# Altium PCB PCB_2020-07-26_21-29-46_2020-09-12_09-12-22.pcbdoc
Units mm, origin at the board's own origin, x right, y up, seen from the top; angles counter-clockwise.
Board outline 85.95 x 97.55 mm, 2 copper layers (Top Layer, Bottom Layer); 55 components, 34 nets, 197 pads, 66 vias.
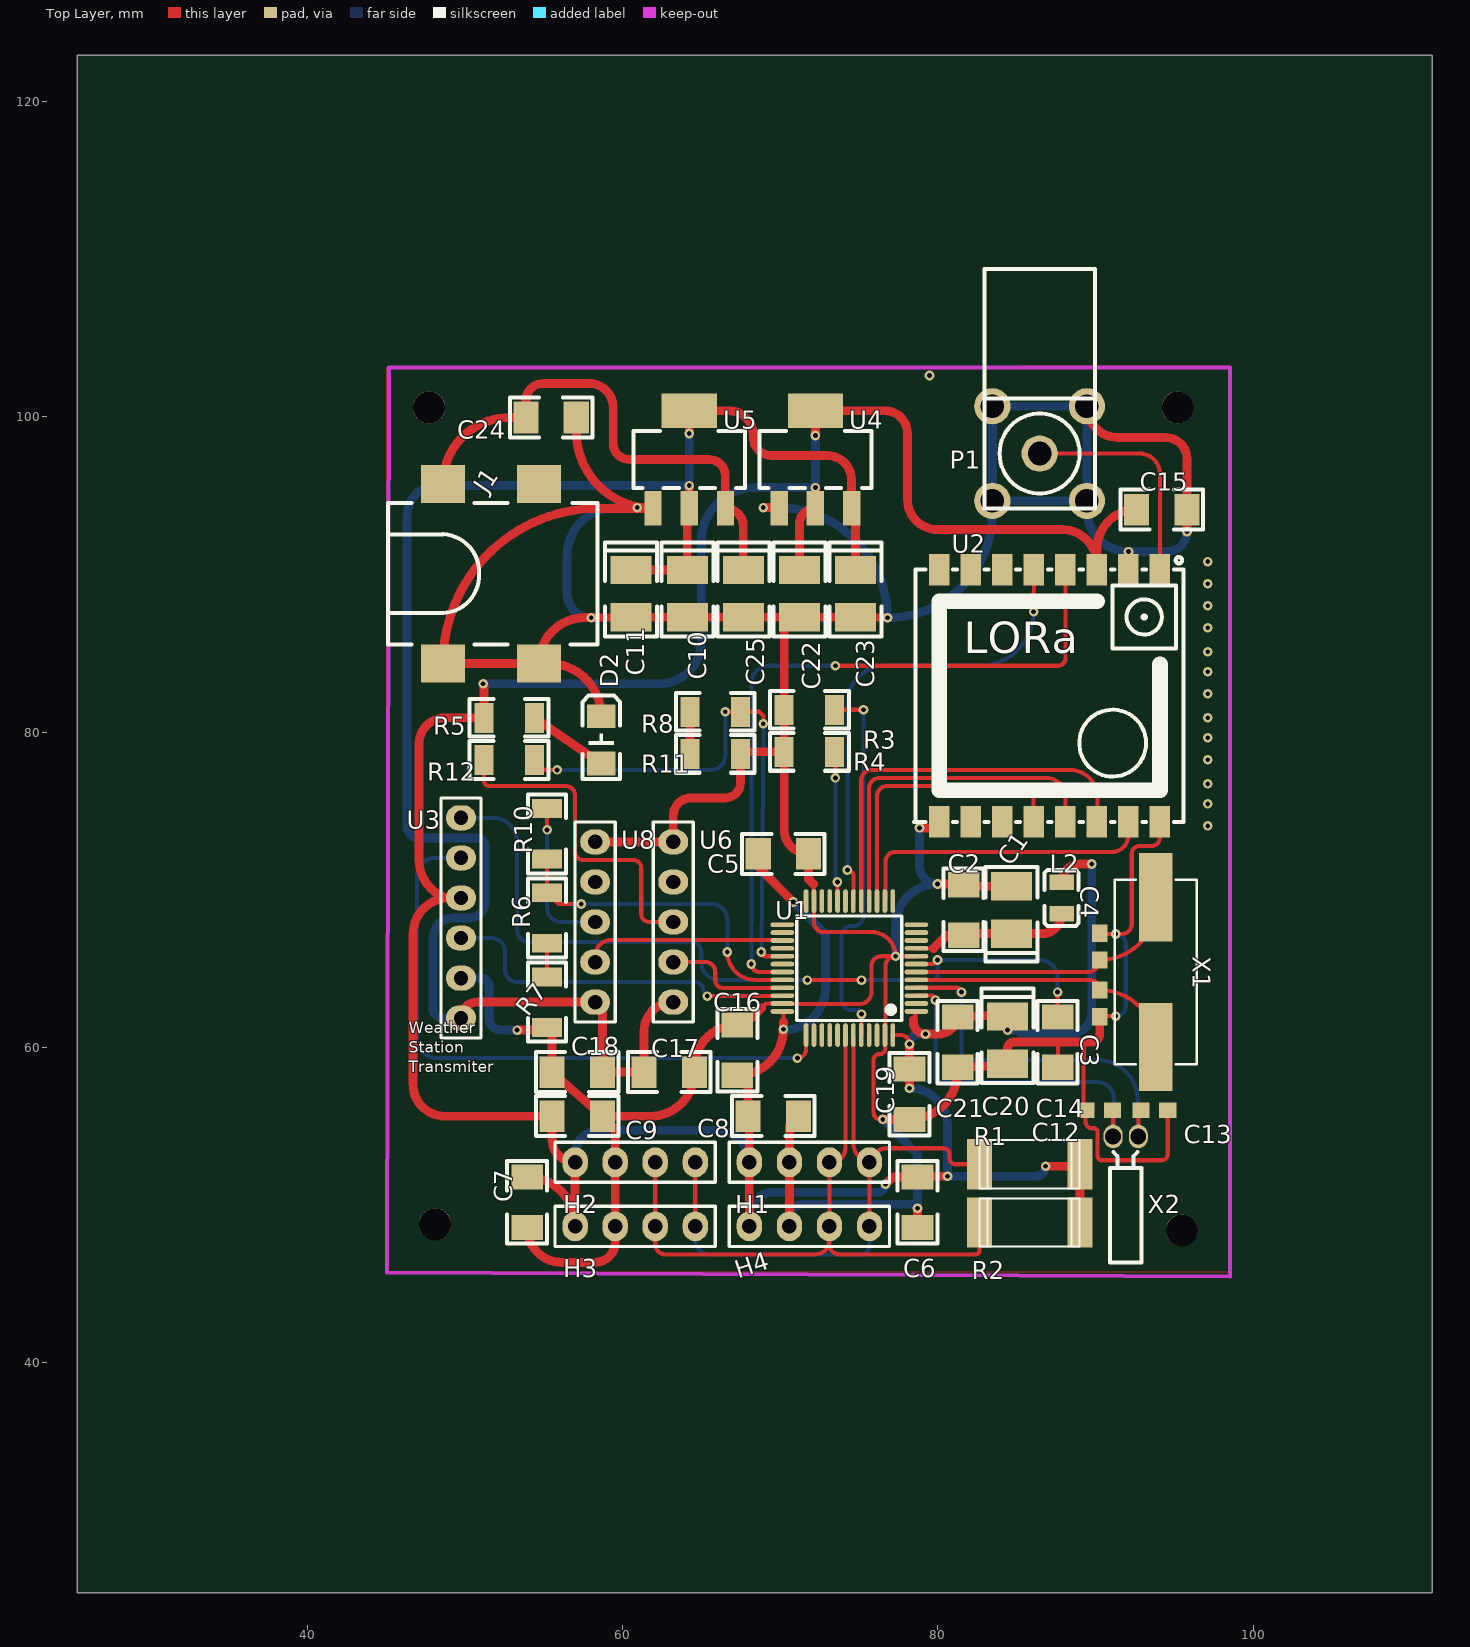
[diagram p0: Top Layer view]
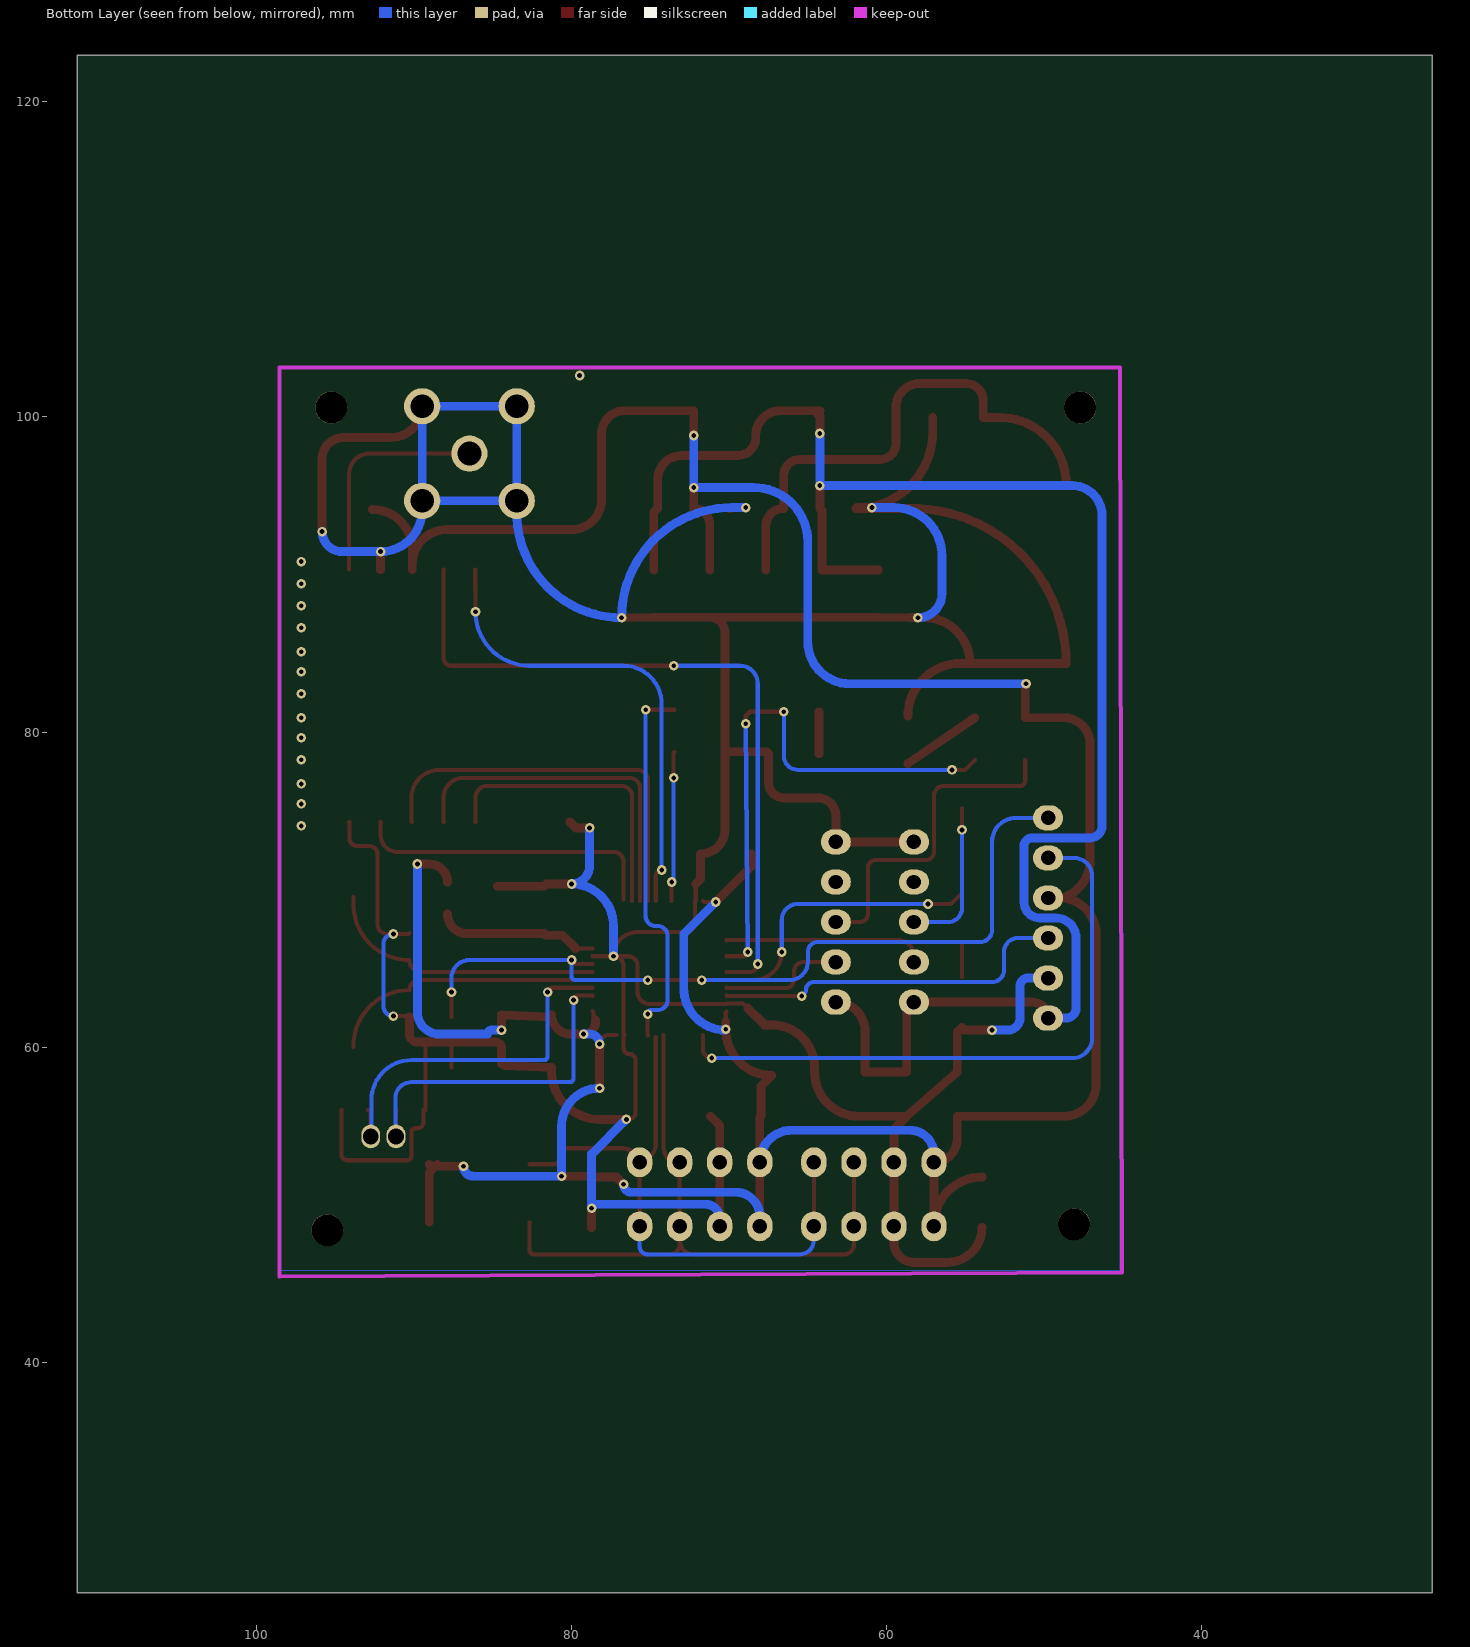
[diagram p1: Bottom Layer view, seen from below]

## Layer stack, top to bottom
Top Layer: signal copper (thickness not stored)
Dielectric: dielectric 0.32, FR-4, Dk 4.8
Bottom Layer: signal copper (thickness not stored)

## Board outline
111.351,25.4 25.4,25.4 25.4,122.953 111.351,122.953

## Components (designator, comment, footprint, x,y, rotation, side; value= is the part's Value field where it differs from the comment)
C1 "1uF" CAP-SMD_L3.5-W2.8-R-RD 84.681,68.722 r270 top
C2 "100nF" 1206 81.633,68.722 r90 top
C3 "10PF" 0603 90.269,63.642 r270 top
C4 "10PF" 0603 90.269,65.547 r90 top
C5 "100nF" 1206 70.203,72.278 r180 top
C6 "100nF" 1206 78.712,50.18 r90 top
C7 "100nF" 1206 53.947,50.18 r90 top
C8 "100nF" 1206 69.568,55.641 r180 top
C9 "100nF" 1206 57.122,55.641 r180 top
C10 "10uF" CAP-SMD_L3.5-W2.8-R-RD 64.107,88.788 r90 top
C11 "10uF" CAP-SMD_L3.5-W2.8-R-RD 60.551,88.788 r90 top
C12 "5PF" 0603 89.38,56.022 r0 top
C13 "5PF" 0603 94.587,56.022 r180 top
C14 "100nF" 1206 87.602,60.34 r90 top
C15 "100nF" 1206 94.206,94.122 r180 top
C16 "100nF" 1206 67.282,59.832 r90 top
C17 "100nF" 1206 62.964,58.435 r180 top
C18 "100nF" 1206 57.122,58.435 r0 top
C19 "100nF" 1206 78.204,57.038 r270 top
C20 "100nF" 1206 81.252,60.34 r270 top
C21 "10uF" CAP-SMD_L3.5-W2.8-R-RD 84.427,60.467 r90 top
C22 "10uF" CAP-SMD_L3.5-W2.8-R-RD 71.219,88.788 r90 top
C23 "10uF" CAP-SMD_L3.5-W2.8-R-RD 74.775,88.788 r90 top
C24 "100nF" 1206 55.471,99.964 r0 top
C25 "10uF" CAP-SMD_L3.5-W2.8-R-RD 67.663,88.788 r90 top
D2 "LED" LED1206-R-RD 58.646,79.517 r270 top
H1 "Header_4*1" HEADER_4*1 71.854,52.72 r90 top
H2 "Header_4*1" HEADER_4*1 60.805,52.72 r90 top
H3 "Header_4*1" HEADER_4*1 60.805,48.656 r90 top
H4 "Header_4*1" HEADER_4*1 71.854,48.656 r90 top
J1 "POWER_JACK" POWER_JACK_SMD_OVERPASTE_TOE 51.661,90.058 r0 top
L2 "4.7uH" L0805 87.856,69.484 r90 top
P1 "SMA-KWE" SMA-KWE 86.459,97.678 r90 top
R1 "4.7K" R_2512 85.824,52.593 r180 top
R2 "4.7K" R_2512 85.824,48.91 r180 top
R3 "10k" R1206 71.854,81.422 r0 top
R4 "10k" R1206 71.854,78.755 r0 top
R5 "100" R1206 52.804,80.914 r0 top
R6 "10K" R1206 55.217,68.214 r270 top
R7 "10K" R1206 55.217,62.88 r270 top
R8 "10K" R1206 65.885,81.295 r0 top
R10 "10K" R1206 55.217,73.548 r90 top
R11 "10K" R1206 65.885,78.628 r0 top
R12 "10K" R1206 52.804,78.247 r180 top
U1 "STM32F103CBT6" LQFP-48_L7.0-W7.0-P0.50-LS9.0-BL 74.394,65.039 r90 top
U2 "RA-02" WIRELM-SMD_RA-02 87.094,82.311 r270 top
U3 "HEADER6*1" HEADER_6*1#1 49.756,68.214 r0 top
U4 "AMS1117-3.3V" SOT-223-3_L6.5-W3.4-P2.30-LS7.0-BR 72.235,97.297 r270 top
U5 "AMS1117-5V" SOT-223-3_L6.5-W3.4-P2.30-LS7.0-BR 64.234,97.297 r270 top
U6 "HEADER 5*1" HEADER_6*1#2 61.948,64.15 r0 top
U8 "HEADER 5*1" HEADER_6*1#2 56.995,64.15 r0 top
X1 "8MHz" HC-49US-SMD 93.825,64.531 r90 top
X2 "Seiko" OSC-TH_BD2.0-P0.50 91.92,53.355 r180 top
? "" ? 41.668,74.437 r0 top
? "" ? 71.727,41.943 r0 top

## Footprints (in the part's own frame and the unit in brackets; to place one, negate y for a bottom-side part, rotate by r counter-clockwise, add the part's x,y. Pads: shape width x height; smd on the part's side, far side on the other; paste and mask are expansions set on the pad)
0603 [mm]
  rect 1.1x1 smd: 1(0,0) 2(1.7,0)
1206 [mm]
  rect 1.6x2 smd: 1(-1.6,0) 2(1.6,0)
  silkscreen extent -2.61,-1.27 2.62,1.27
CAP-SMD_L3.5-W2.8-R-RD [mm]
  rect 1.8x2.6 smd: 1(1.501,0) 2(-1.501,0)
  silkscreen extent -2.73,-1.65 3.26,1.65
HC-49US-SMD [mm]
  rect 5.6x2.1 smd: 1(-4.5,0) 2(5,0)
  silkscreen extent -5.6,-2.6 6.1,2.6
HEADER_4*1 [mm]
  oval 1.9x1.6 hole 0.914: 1(0,3.81) 2(0,1.27) 3(0,-1.27) 4(0,-3.81)
  silkscreen extent -1.27,-5.08 1.27,5.08
HEADER_6*1#1 [mm]
  oval 1.9x1.6 hole 0.914: 1(0,6.35) 2(0,3.81) 3(0,1.27) 4(0,-1.27) 5(0,-3.81) 6(0,-6.35)
  silkscreen extent -1.27,-7.62 1.27,7.62
HEADER_6*1#2 [mm]
  oval 1.9x1.6 hole 0.914: 1(1.27,8.89) 2(1.27,6.35) 3(1.27,3.81) 4(1.27,1.27) 5(1.27,-1.27)
  silkscreen extent 0,-2.54 2.54,10.16
L0805 [mm]
  rect 1x1.55 smd: 1(-1,0) 2(1,0)
  silkscreen extent -1.78,-1.08 1.78,1.08
LED1206-R-RD [mm]
  rect 1.5x1.8 smd: 1(1.5,0) 2(-1.5,0)
  silkscreen extent -2.8,-1.2 2.5,1.2
LQFP-48_L7.0-W7.0-P0.50-LS9.0-BL [mm]
  oval 0.3x1.5 smd: 1(-2.75,-4.25) 2(-2.25,-4.25) 3(-1.75,-4.25) 4(-1.25,-4.25) 5(-0.75,-4.25) 6(-0.25,-4.25) 7(0.25,-4.25) 8(0.75,-4.25) 9(1.25,-4.25) 10(1.75,-4.25) 11(2.25,-4.25) 12(2.75,-4.25) 25(2.75,4.25) 26(2.25,4.25) 27(1.75,4.25) 28(1.25,4.25) 29(0.75,4.25) 30(0.25,4.25) 31(-0.25,4.25) 32(-0.75,4.25) 33(-1.25,4.25) 34(-1.75,4.25) 35(-2.25,4.25) 36(-2.75,4.25)
  oval 1.5x0.3 smd: 13(4.25,-2.75) 14(4.25,-2.25) 15(4.25,-1.75) 16(4.25,-1.25) 17(4.25,-0.75) 18(4.25,-0.25) 19(4.25,0.25) 20(4.25,0.75) 21(4.25,1.25) 22(4.25,1.75) 23(4.25,2.25) 24(4.25,2.75) 37(-4.25,2.75) 38(-4.25,2.25) 39(-4.25,1.75) 40(-4.25,1.25) 41(-4.25,0.75) 42(-4.25,0.25) 43(-4.25,-0.25) 44(-4.25,-0.75) 45(-4.25,-1.25) 46(-4.25,-1.75) 47(-4.25,-2.25) 48(-4.25,-2.75)
  silkscreen extent -3.33,-3.31 3.3,3.34
OSC-TH_BD2.0-P0.50 [mm]
  oval 1.2x1.5 hole 1: 1(-0.8,-1) 2(0.8,-1)
  silkscreen extent -1,-0.02 1,7
POWER_JACK_SMD_OVERPASTE_TOE [mil]
  rect 110.2x94.5 smd: GND(-120,-224) P$4(120,-224) VIN0(-120,224) VIN1(120,224)
  silkscreen extent -258,-177 266,177
R1206 [mm]
  rect 1.2x1.9 smd: 1(-1.6,0) 2(1.6,0)
  silkscreen extent -2.5,-1.2 2.5,1.2
R_2512 [mil]
  rect 63x125 smd: 1(125.5,0) 2(-125.5,0)
  silkscreen extent -125,-60 125,60
SMA-KWE [mm]
  round 2.3 hole 1.5: 1(0,0) 2(-3,3) 3(-3,-3) 4(3,-3) 5(3,3)
  silkscreen extent -3.5,-3.5 11.7,3.5
SOT-223-3_L6.5-W3.4-P2.30-LS7.0-BR [mm]
  rect 2.2x1.1 smd: 1(3.099,-2.3) 2(3.099,0) 3(3.099,2.3)
  rect 2.2x3.5 smd: 4(-3.099,0)
  silkscreen extent -1.8,-3.55 1.8,3.55
WIRELM-SMD_RA-02 [mm]
  rect 2x1.3 smd: 1(-8,7) 2(-8,5) 3(-8,3) 4(-8,1) 5(-8,-1) 6(-8,-3) 7(-8,-5) 8(-8,-7) 9(8,-7) 10(8,-5) 11(8,-3) 12(8,-1) 13(8,1) 14(8,3) 15(8,4.998) 16(8,7)
  silkscreen extent -8.8,-8.6 8,8.5
? [mm]

## Free pads (board coordinates)
  round 2.032 hole 2.032 unplated: ""(47.724,100.599) ""(48.105,48.783) ""(95.222,100.599) ""(95.476,48.402)

## Via types
v1: diameter 0.61, hole 0.305, Top Layer to Bottom Layer, 66 vias

## Nets (pads, with @x,y where several pads share a name; then routed paths per layer and width w, separated by ;. In a path a pad name is that pad's centre, name@x,y a point inside that pad or via, vN(x,y) a via of type N, cw(c..) or ccw(c..) an arc to the next point about the centre after c; other vN are vias at no path point)
+3.3V: C5.2 C6.2 C7.2 C8.2 C9.2 C15.2 C16.1 C19.1 C20.1 C21.1 C22.1 H1.1 H2.1 H3.1 H4.1 L2.2 R1.2 R2.2 R5.1 U1.1 U1.24 U1.36 U1.48 U2.3 U3.3 U4.2 U4.4 | length 238.4
  Top Layer w0.26: U1.36 70.203,62.23 70.203,61.61 ; v1(70.838,69.23) 71.586,69.23 U1.24 ; U1.48 77.628,60.789 cw(c77.628,60.213) v1(78.204,60.213) ; 78.585,61.864 78.585,62.23 U1.1@78.644,62.295
  Top Layer w0.56: U3.3@49.629,69.357 cw(c49.629,71.897) 47.089,71.897 47.089,79.263 cw(c48.74,79.263) 48.74,80.914 R5.1 51.205,83.022 v1(51.153,83.073) ; U3.3 48.994,69.484 ccw(c48.994,67.198) 46.708,67.198 46.708,57.673 ccw(c48.74,57.673) 48.74,55.641 C9.2 55.523,54.193 ccw(c56.995,54.193) H2.1 H3.1 56.995,48.732 ccw(c53.947,48.732) C7.2 ; H4.1 H1.1 68.044,55.565 C8.2 67.969,57.546 C16.1 ccw(c67.282,61.153) v1(70.203,61.153) 70.203,61.61 ; C5.2 68.604,71.465 v1(70.838,69.23) ; C22.1 71.219,93.182 cw(c72.235,93.182) U4.2 v1(72.235,95.519) ; v1(72.235,98.821) U4.4 76.63,100.395 cw(c76.63,98.948) 78.077,98.948 78.077,94.757 ccw(c79.982,94.757) 79.982,92.852 87.891,92.852 cw(c87.891,90.648) U2.3@90.094,90.648 ; v1(76.68,51.323) 77.137,51.78 C6.2 78.764,51.831 v1(80.617,51.831) ; v1(78.204,57.419) C19.1 v1(78.204,60.213) ; 78.458,61.737 78.458,61.61 ccw(c79.22,61.61) v1(79.22,60.848) 80.034,60.848 ccw(c80.034,62.067) C20.1@81.252,62.067 ; C20.1 C21.1@84.4,62.067 ; v1(84.427,61.102) C21.1 C21.1@84.4,62.067 ; C21.1@84.427,62.038 ccw(c84.399,62.038) C21.1@84.399,62.067 ; v1(86.84,52.466) 88.885,52.466 R1.2 ; L2.2 cw(c89.015,70.484) 89.015,71.643 v1(89.761,71.643) ; R1.2@88.504,52.593 89.012,52.085 R2.2 ; U2.3 90.094,91.61 cw(c92.607,91.61) C15.2
  Bottom Layer w0.56: v1(51.153,83.073) 62.329,83.073 ccw(c62.329,85.74) 64.996,85.74 64.996,92.09 cw(c68.425,92.09) 68.425,95.519 v1(72.235,95.519) v1(72.235,98.821) ; H2.1 56.995,53.228 cw(c58.519,53.228) 58.519,54.752 66.012,54.752 cw(c66.012,52.72) H1.1 ; H4.1 68.044,49.291 cw(c69.568,49.291) 69.568,50.815 76.172,50.815 ccw(c76.172,51.323) v1(76.68,51.323) ; v1@70.203,61.102 ccw(c70.203,63.769) 72.87,63.769 ; v1(70.838,69.23) 72.87,67.198 72.87,66.563 ; 72.87,63.769 72.87,66.512 ; v1(78.204,57.419) cw(c78.204,55.006) 80.617,55.006 v1(80.617,51.831) 86.205,51.831 ccw(c86.205,52.466) v1(86.84,52.466) ; v1(78.204,60.213) cw(c78.839,60.213) 78.839,60.848 v1(79.22,60.848) ; v1(84.427,61.102) 85.062,61.102 cw(c85.062,60.848) 85.316,60.848 88.364,60.848 ccw(c88.364,62.245) 89.761,62.245 v1(89.761,71.643)
+5V: C10.1 C11.1 C17.2 C18.2 C23.1 U3.6 U4.3 U5.2 U5.4 U6.5 U8.5 | length 113.3
  Top Layer w0.56: U3.6 cw(c50.772,61.864) 50.772,62.88 U8.5 58.722,62.423 C18.2 C17.2 61.365,61.026 cw(c63.218,61.026) U6.5 ; C11.1 C10.1 64.107,94.071 U5.2 v1(64.234,95.646) ; v1(64.234,98.948) 64.234,100.04 U5.4@64.412,100.218 ; U5.4 66.724,100.395 cw(c66.724,98.821) 68.298,98.821 68.298,98.694 ccw(c69.441,98.694) 69.441,97.551 72.997,97.551 cw(c72.997,96.027) 74.521,96.027 74.521,94.212 ccw(c74.535,94.212) U4.3 74.775,93.958 C23.1
  Bottom Layer w0.56: U3.6 48.613,61.864 cw(c48.613,62.499) 47.978,62.499 47.978,66.944 cw(c49.248,66.944) 49.248,68.214 50.264,68.214 ccw(c50.264,69.23) 51.28,69.23 51.28,72.786 ccw(c50.772,72.786) 50.772,73.294 47.089,73.294 cw(c47.089,74.056) 46.327,74.056 46.327,74.564 46.327,93.741 cw(c48.232,93.741) 48.232,95.646 v1(64.234,95.646) v1(64.234,98.948)
GND: C1.2 C2.2 C3.2 C4.2 C5.1 C6.1 C7.1 C8.1 C9.1 C10.2 C11.2 C12.1 C13.1 C14.1 C15.1 C16.2 C17.1 C18.1 C19.2 C20.2 C21.2 C22.2 C23.2 C24.2 C25.2 D2.2 H1.2 H2.2 H3.2 H4.2 J1.GND J1.P$4 P1.2 P1.3 P1.4 P1.5 R3.1 R4.1 R7.2 R11.2 U1.8 U1.23 U1.35 U1.47 U2.2 U2.9 U2.16 U3.5 U4.1 U5.1 U6.1 U8.1 | length 354.2
  Top Layer w0.26: 68.806,62.499 69.097,62.789 U1.35 ccw(c70.181,62.789) 70.181,62.753 75.029,62.753 ccw(c75.029,63.515) 75.791,63.515 75.791,65.166 cw(c76.415,65.166) 76.415,65.789 v1(77.323,65.789) ; 72.108,70.373 72.108,69.325 U1.23 72.145,67.924 ccw(c72.743,67.924) 72.743,67.325 73.378,67.325 75.787,67.325 cw(c75.787,65.789) v1(77.323,65.789) ; v1(76.508,55.438) 76.375,55.438 cw(c76.375,55.895) 75.918,55.895 75.918,59.197 cw(c76.299,59.197) 76.299,59.578 ccw(c76.299,59.959) 76.68,59.959 76.68,60.753 ccw(c76.644,60.753) U1.47 ccw(c76.644,60.825) 76.68,60.825 76.68,65.166 cw(c77.304,65.166) v1@77.304,65.789 ; U1.8 v1(77.323,65.789) ; C14.1 87.613,60.34 ; C14.1@87.602,58.867 ccw(c87.602,58.877) C14.1@87.613,58.877 ; C12.1@89.253,56.022 89.253,59.477 ccw(c89.253,59.484) 89.261,59.484 89.261,60.34 ; C12.1@89.344,56.058 ccw(c89.38,56.058) C12.1 89.38,55.26 ccw(c89.761,55.26) 89.761,54.879 89.888,54.879 cw(c89.888,54.625) 90.142,54.625 90.142,53.101 ccw(c90.396,53.101) 90.396,52.847 94.206,52.847 ccw(c94.206,53.228) 94.587,53.228 C13.1 ; C3.2 90.319,61.991 v1(91.285,61.991) ; C4.2 90.318,67.198 v1(91.285,67.198) 91.666,67.198 ccw(c91.666,67.833) 92.301,67.833 92.301,72.278 cw(c92.809,72.278) 92.809,72.786 93.571,72.786 ccw(c93.571,73.294) 94.079,73.294 94.079,74.296 cw(c94.094,74.296) U2.16
  Top Layer w0.56: v1(53.312,61.102) 55.04,61.102 R7.2 55.523,60.974 C18.1 C9.1 ; C7.1 ccw(c56.158,48.58) 56.158,46.37 58.265,46.37 ccw(c58.265,47.64) 59.535,47.64 H3.2 H2.2 59.535,54.828 C9.1 ; C24.2 57.071,99.061 ccw(c61.935,99.061) U5.1 ; v1(58.011,87.264) C11.2 C10.2 C25.2 C22.2 ; U8.1 U6.1 63.218,74.691 cw(c64.361,74.691) 64.361,75.834 66.52,75.834 ccw(c66.52,76.799) 67.485,76.799 R11.2 67.612,78.755 R4.1 ; 58.503,87.268 57.61,87.268 ccw(c57.61,84.368) J1.P$4 ; D2.2 ccw(c55.295,81.016) 55.295,84.368 J1.P$4 ; v1(60.932,94.249) 61.884,94.249 U5.1 ; 68.806,62.499 67.739,61.432 C16.2 ccw(c67.282,58.713) 64.564,58.713 C17.1 cw(c61.77,58.435) 61.77,55.641 C9.1 ; v1(68.933,94.249) 69.885,94.249 U4.1 ; H4.2 H1.2 70.584,55.057 C8.1 ; 72.108,70.373 71.803,70.678 C5.1 cw(c71.803,73.826) 70.255,73.826 R4.1 ; v1(76.508,55.438) C19.2 ccw(c78.204,58.486) C20.2@81.252,58.486 ; v1(76.807,87.264) C23.2 C22.2 ; C6.1 v1(78.712,49.799) ; v1(78.839,73.929) 79.712,73.929 U2.9 ; v1(79.982,70.373) 81.582,70.373 C2.2 81.732,70.223 C1.2 ; C20.2@81.252,58.485 C20.2 84.201,58.866 C21.2 84.427,59.959 cw(c84.808,59.959) 84.808,60.34 89.761,60.34 ccw(c89.761,60.848) 90.269,60.848 C3.2 C3.2@90.269,61.534 ; P1.4 ccw(c91.443,100.677) 91.443,98.694 92.047,98.694 94.46,98.694 cw(c94.46,97.348) 95.806,97.348 C15.1 v1(95.806,92.725) ; U2.2 v1(92.094,91.455) ; J1.P$4 J1.GND cw(c58.443,84.368) 58.443,94.198 U5.1 ; R4.1 R3.1 70.255,86.321 cw(c71.219,86.321) C22.2
  Bottom Layer w0.26: v1(91.285,61.991) ccw(c91.285,62.626) 91.92,62.626 91.92,66.563 ccw(c91.285,66.563) v1(91.285,67.198)
  Bottom Layer w0.56: U3.5 51.026,64.404 cw(c51.026,63.896) 51.534,63.896 51.534,61.864 ccw(c52.296,61.864) 52.296,61.102 v1(53.312,61.102) ; v1(58.011,87.264) cw(c58.011,88.788) 56.487,88.788 56.487,91.201 cw(c59.535,91.201) 59.535,94.249 v1(60.932,94.249) ; v1(68.933,94.249) 69.822,94.249 cw(c69.822,87.264) v1(76.807,87.264) ccw(c76.807,93.916) 83.46,93.916 P1.2 ; H4.2 70.584,49.164 cw(c71.473,49.164) 71.473,50.053 71.981,50.053 78.458,50.053 cw(c78.458,49.799) v1(78.712,49.799) 78.712,53.233 v1(76.508,55.438) ; v1(77.323,65.789) 77.323,67.713 cw(c79.982,67.713) v1(79.982,70.373) cw(c79.982,71.516) 78.839,71.516 v1(78.839,73.929) ; v1(95.806,92.725) cw(c94.536,92.725) 94.536,91.455 v1(92.094,91.455) cw(c92.094,94.09) 89.459,94.09 P1.3 ; P1.2 P1.5 P1.4 P1.3 ; P1.2 P1.3
I2C_SCL: H1.3 H2.3 H3.3 H4.3 R2.1 U1.42 | length 42.9
  Top Layer w0.26: H2.3 H3.3 62.075,47.513 ccw(c62.71,47.513) 62.71,46.878 72.235,46.878 ccw(c72.235,47.767) H4.3@73.124,47.767 ; H1.3@73.124,52.647 ccw(c73.124,53.667) 74.145,53.667 U1.42 ; H1.3 H4.3 73.124,47.513 ccw(c73.759,47.513) 73.759,46.878 82.395,46.878 ccw(c82.395,47.132) 82.649,47.132 82.649,48.897 ccw(c82.637,48.897) R2.1
I2C_SDA: H1.4 H2.4 H3.4 H4.4 R1.1 U1.43 | length 38.9
  Top Layer w0.26: H3.4 H2.4 ; 74.644,53.792 U1.43@74.644,60.662 ; 74.644,53.919 ccw(c75.844,53.919) 75.844,52.72 cw(c76.733,52.72) 76.733,53.609 80.363,53.609 cw(c80.363,53.228) 80.744,53.228 80.744,52.974 ccw(c81.125,52.974) 81.125,52.593 R1.1 ; H4.4 H1.4
  Bottom Layer w0.26: H3.4 64.615,47.767 ccw(c65.504,47.767) 65.504,46.878 75.156,46.878 ccw(c75.156,47.386) 75.664,47.386 H4.4
LORA_DIO0: U1.18 U2.5 | length 30.5
  Top Layer w0.26: v1(74.267,71.262) cw(c74.267,70.885) 74.644,70.885 U1.18 ; v1(86.078,87.645) U2.5@86.094,90.312
  Bottom Layer w0.26: v1(74.267,71.262) 74.267,81.803 cw(c76.68,81.803) 76.68,84.216 82.649,84.216 ccw(c82.649,87.645) v1(86.078,87.645)
LORA_MISO: U1.16 U2.13 | length 22.3
  Top Layer w0.26: U1.16 75.644,76.449 cw(c76.299,76.449) 76.299,77.104 86.84,77.104 cw(c86.84,75.834) 88.11,75.834 88.11,74.327 cw(c88.094,74.327) U2.13
LORA_MOSI: U1.17 U2.14 | length 25.6
  Top Layer w0.26: U1.17 75.145,76.965 cw(c75.791,76.965) 75.791,77.612 88.364,77.612 cw(c88.364,75.834) 90.142,75.834 90.142,74.359 cw(c90.094,74.359) U2.14
LORA_NSS: U1.14 U2.15 | length 19.6
  Top Layer w0.26: U1.14@76.68,69.377 76.68,71.77 cw(c77.315,71.77) 77.315,72.405 91.031,72.405 ccw(c91.031,73.466) 92.093,73.466 U2.15
LORA_RST: U1.31 U2.4 | length 46.5
  Top Layer w0.26: v1(68.171,65.293) ccw(c68.675,65.293) 68.675,64.789 U1.31 ; v1(73.505,84.216) 87.602,84.216 ccw(c87.602,84.724) 88.11,84.724 88.11,90.295 ccw(c88.094,90.295) U2.4
  Bottom Layer w0.26: v1(68.171,65.293) 68.171,83.073 cw(c69.314,83.073) 69.314,84.216 v1(73.505,84.216)
LORA_SCK: U1.15 U2.12 | length 18.9
  Top Layer w0.26: U1.15 76.145,75.933 cw(c76.807,75.933) 76.807,76.596 85.316,76.596 cw(c85.316,75.834) 86.078,75.834 86.078,74.327 ccw(c86.094,74.327) U2.12
NRST: C14.2 U1.7 U3.1 | length 52.1
  Top Layer w0.26: v1(71.727,64.277) v1(75.156,64.277) ; U1.7 79.724,65.289 v1(79.982,65.547) ; C14.2 v1(87.602,63.515)
  Bottom Layer w0.26: U3.1 51.788,74.564 cw(c51.788,73.04) 53.312,73.04 53.312,67.452 ccw(c54.074,67.452) 54.074,66.69 64.361,66.69 cw(c64.361,66.055) 64.996,66.055 64.996,65.42 ccw(c66.139,65.42) 66.139,64.277 v1(71.727,64.277) ; v1(75.156,64.277) 79.728,64.277 ccw(c79.728,64.531) 79.982,64.531 v1(79.982,65.547) 86.459,65.547 cw(c86.459,64.404) 87.602,64.404 v1(87.602,63.515)
R5_2: D2.1 R5.2 | length 5.1
  Top Layer w0.56: R5.2 D2.1
R6_2: R6.2 R7.1 | length 2.1
  Top Layer w0.26: R7.1 R6.2
R8_1: R8.1 R11.1 | length 2.7
  Top Layer w0.56: R11.1 R8.1
R10_2: R10.2 U8.3 | length 9.9
  Top Layer w0.26: v1(55.217,73.802) R10.2
  Bottom Layer w0.26: v1(55.217,73.802) 55.217,68.849 ccw(c56.106,68.849) 56.106,67.96 U8.3
R12_2: R12.2 U6.3 | length 21.2
  Top Layer w0.26: R12.2 51.205,76.926 ccw(c51.534,76.926) 51.534,76.596 56.36,76.596 cw(c56.36,75.961) 56.995,75.961 56.995,72.405 ccw(c57.503,72.405) 57.503,71.897 60.678,71.897 cw(c60.678,71.389) 61.186,71.389 61.186,68.468 ccw(c61.694,68.468) 61.694,67.96 U6.3
S$98: 
S$107: 
SWCLK: U1.37 U3.2 | length 40.4
  Top Layer w0.26: v1(71.092,59.324) ccw(c71.092,59.876) 71.644,59.876 U1.37
  Bottom Layer w0.26: U3.2 48.105,72.024 ccw(c48.105,70.881) 46.962,70.881 46.962,60.594 ccw(c48.232,60.594) 48.232,59.324 v1(71.092,59.324)
SWDIO: U1.34 U3.4 | length 23.2
  Top Layer w0.26: v1(65.377,63.261) 70.117,63.261 U1.34
  Bottom Layer w0.26: U3.4 51.661,66.944 cw(c51.661,66.055) 52.55,66.055 52.55,65.166 52.55,64.912 ccw(c53.312,64.912) 53.312,64.15 64.615,64.15 cw(c64.615,63.642) 65.123,63.642 ccw(c65.504,63.642) 65.504,63.261 v1(65.377,63.261)
U1_3: C12.2 U1.3 X2.2 | length 22.5
  Top Layer w0.26: U1.3@78.672,63.261 cw(c78.672,63.289) U1.3 79.574,63.289 cw(c79.574,63.007) v1(79.855,63.007) ; C12.2 cw(c91.081,55.982) 91.121,55.982 X2.2
  Bottom Layer w0.26: v1(79.855,63.007) 79.855,58.054 ccw(c80.109,58.054) 80.109,57.8 90.142,57.8 cw(c90.142,56.784) 91.158,56.784 91.158,54.393 cw(c91.121,54.393) X2.2
U1_4: C13.2 U1.4 X2.1 | length 24
  Top Layer w0.26: U1.4@78.664,63.769 cw(c78.664,63.789) U1.4 81.232,63.789 cw(c81.232,63.515) v1(81.506,63.515) ; X2.1 92.72,55.855 cw(c92.887,55.855) C13.2
  Bottom Layer w0.26: v1(81.506,63.515) 81.506,59.451 ccw(c81.76,59.451) 81.76,59.197 90.142,59.197 cw(c90.142,56.657) 92.682,56.657 92.682,54.393 ccw(c92.72,54.393) X2.1
U1_5: C3.1 U1.5 X1.1 | length 17.6
  Top Layer w0.26: U1.5 89.623,64.289 cw(c89.623,63.642) C3.1 cw(c90.269,60.086) 93.825,60.086 X1.1
U1_6: C4.1 U1.6 X1.2 | length 18.1
  Top Layer w0.26: U1.6 89.512,64.789 ccw(c89.512,65.547) C4.1 ccw(c90.269,69.103) 93.825,69.103 X1.2
U1_9: C1.1 C2.1 L2.1 U1.9 | length 10.3
  Top Layer w0.26: U1.9 79.728,66.289
  Top Layer w0.56: 79.728,66.289 80.562,67.122 C2.1 81.732,67.22 C1.1 86.593,67.22 ccw(c86.593,68.484) L2.1
U1_20: R4.2 U1.20 | length 9.5
  Top Layer w0.26: R4.2 73.505,78.704 v1(73.505,77.104) ; v1(73.632,70.5) U1.20
  Bottom Layer w0.26: v1(73.505,77.104) 73.505,70.627 v1(73.632,70.5)
U1_44: R3.2 U1.44 | length 24.2
  Top Layer w0.26: R3.2 v1(75.283,81.422) ; U1.44@75.145,60.777 ccw(c75.145,60.789) 75.156,60.789 v1(75.156,62.118) ; U1.44 cw(c75.145,60.777) U1.44@75.156,60.777
  Bottom Layer w0.26: v1(75.156,62.118) ccw(c74.902,62.118) 74.902,62.372 74.521,62.372 cw(c74.521,63.007) 73.886,63.007 73.886,67.071 cw(c74.521,67.071) 74.521,67.706 74.648,67.706 ccw(c74.648,68.341) 75.283,68.341 v1(75.283,81.422)
U2_1: P1.1 U2.1 | length 14.5
  Top Layer w0.26: P1.1 92.809,97.678 cw(c92.809,96.393) 94.094,96.393 U2.1
ULTRASONIC1_ECHO: R8.2 R12.1 U1.29 | length 34.7
  Top Layer w0.26: R12.1 55.039,77.612 v1(55.852,77.612) ; v1(66.52,81.295) R8.2 68.679,81.295 68.933,81.041 v1(68.933,80.533) ; v1(68.806,66.055) ccw(c69.072,66.055) 69.072,65.789 U1.29
  Bottom Layer w0.26: v1(55.852,77.612) 65.631,77.612 ccw(c65.631,78.501) 66.52,78.501 v1(66.52,81.295) ; v1(68.806,66.055) v1(68.933,80.533)
ULTRASONIC1_TRIG: U1.33 U6.4 | length 8.1
  Top Layer w0.26: U6.4 65.25,65.42 cw(c65.25,64.785) 65.885,64.785 65.885,64.277 ccw(c66.393,64.277) 66.393,63.769 70.124,63.769 ccw(c70.124,63.789) U1.33
ULTRASONIC2_ECHO: R6.1 R10.1 U1.32 | length 21
  Top Layer w0.26: R10.1 R6.1 55.928,69.103 v1(57.376,69.103) ; v1(66.647,66.055) ccw(c68.414,66.055) 68.414,64.289 U1.32 cw(c70.133,64.289) U1.32@70.133,64.277
  Bottom Layer w0.26: v1(57.376,69.103) 65.631,69.103 cw(c65.631,68.087) 66.647,68.087 v1(66.647,66.055)
ULTRASONIC2_TRIG: U1.27 U8.4 | length 12.9
  Top Layer w0.26: U8.4 58.265,65.801 cw(c59.281,65.801) 59.281,66.817 70.117,66.817 cw(c70.117,66.789) U1.27
VCC: C24.1 C25.1 J1.VIN0 U5.3 | length 33
  Top Layer w0.56: J1.VIN0 cw(c52.83,95.747) 52.83,99.964 C24.1 53.872,101.031 cw(c54.963,101.031) 54.963,102.123 57.884,102.123 cw(c57.884,100.599) 59.408,100.599 59.408,98.313 ccw(c60.424,98.313) 60.424,97.297 65.504,97.297 cw(c65.504,96.281) 66.52,96.281 66.52,94.212 ccw(c66.534,94.212) U5.3 cw(c66.534,93.069) 67.663,93.069 C25.1
pads on no net: J1.VIN1 U1.2 U1.10 U1.11 U1.12 U1.13 U1.19 U1.21 U1.22 U1.25 U1.26 U1.28 U1.30 U1.38 U1.39 U1.40 U1.41 U1.45 U1.46 U2.6 U2.7 U2.8 U2.10 U2.11 U6.2 U8.2
copper on no net:
  other v1: 97.127,74.056 97.127,75.453 97.127,76.723 97.127,78.247 97.127,79.644 97.127,80.914 97.127,82.438 97.127,83.835 97.127,85.105 97.127,86.629 97.127,88.026 97.127,89.423 97.127,90.82 79.474,102.631

## Polygon pours and split planes (outlines as drawn)
GND on Top Layer (solid): 45.057,45.735 45.057,103.139 45.184,103.139 98.524,103.266 98.524,45.735 98.524,45.481 98.524,45.735 45.057,45.735
GND on Bottom Layer (solid): 45.184,45.862 45.184,103.139 98.524,103.139 98.524,45.862 98.524,45.481 98.524,45.862 45.184,45.862

## Silkscreen, mask and mechanical layers (free items; w line width, h text height)
Top Overlay:
  text "Weather             / Station                   / Transmiter" at 46.454,58.181 h1.23

## Text inside footprints (layer, text, board x,y; h text height)
U2: Top Overlay "LORa" at 81.633,84.994 h2